# Altium PCB Microphone-Boards_V1.0.PcbDoc (part 1 of 2)
Units mm, origin at the board's own origin, x right, y up, seen from the top; angles counter-clockwise.
Board outline 112 x 88 mm, 2 copper layers (Top Layer, Bottom Layer), stack 1.548 mm thick; 320 components, 194 nets, 1232 pads, 0 vias.
Unrouted connection lines stored in the file: 718.
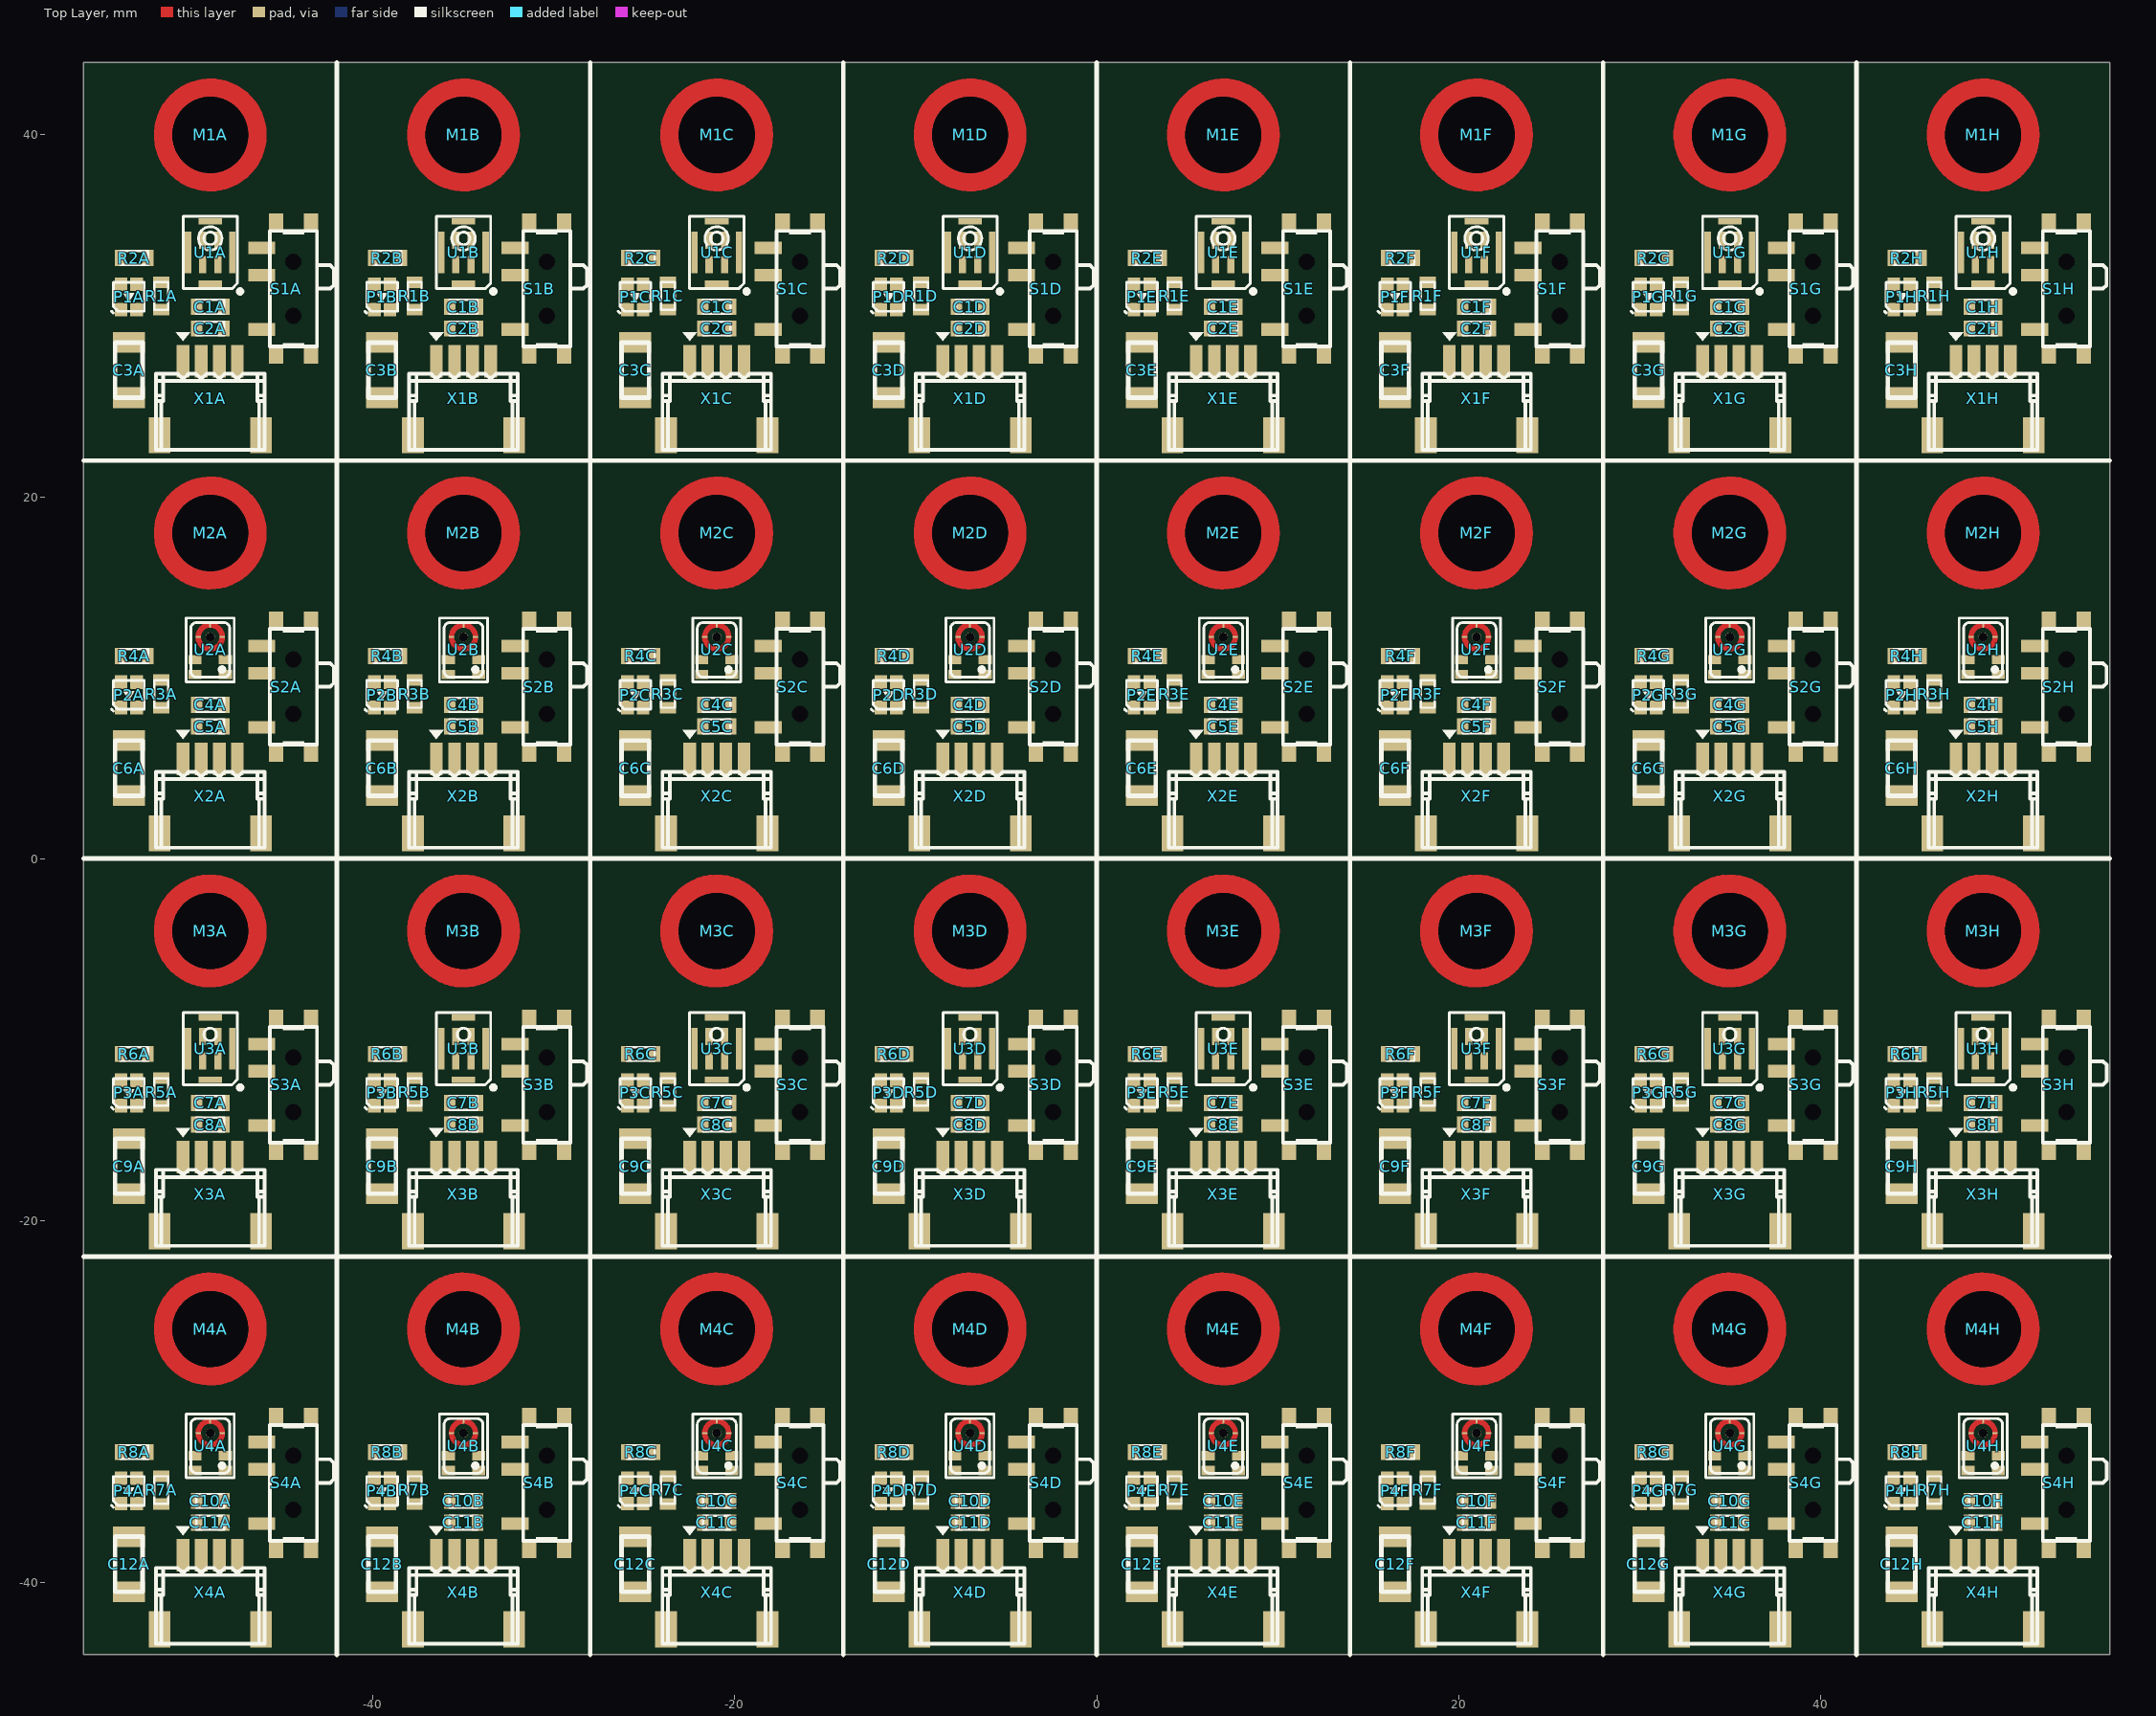
[diagram p0: Top Layer view]
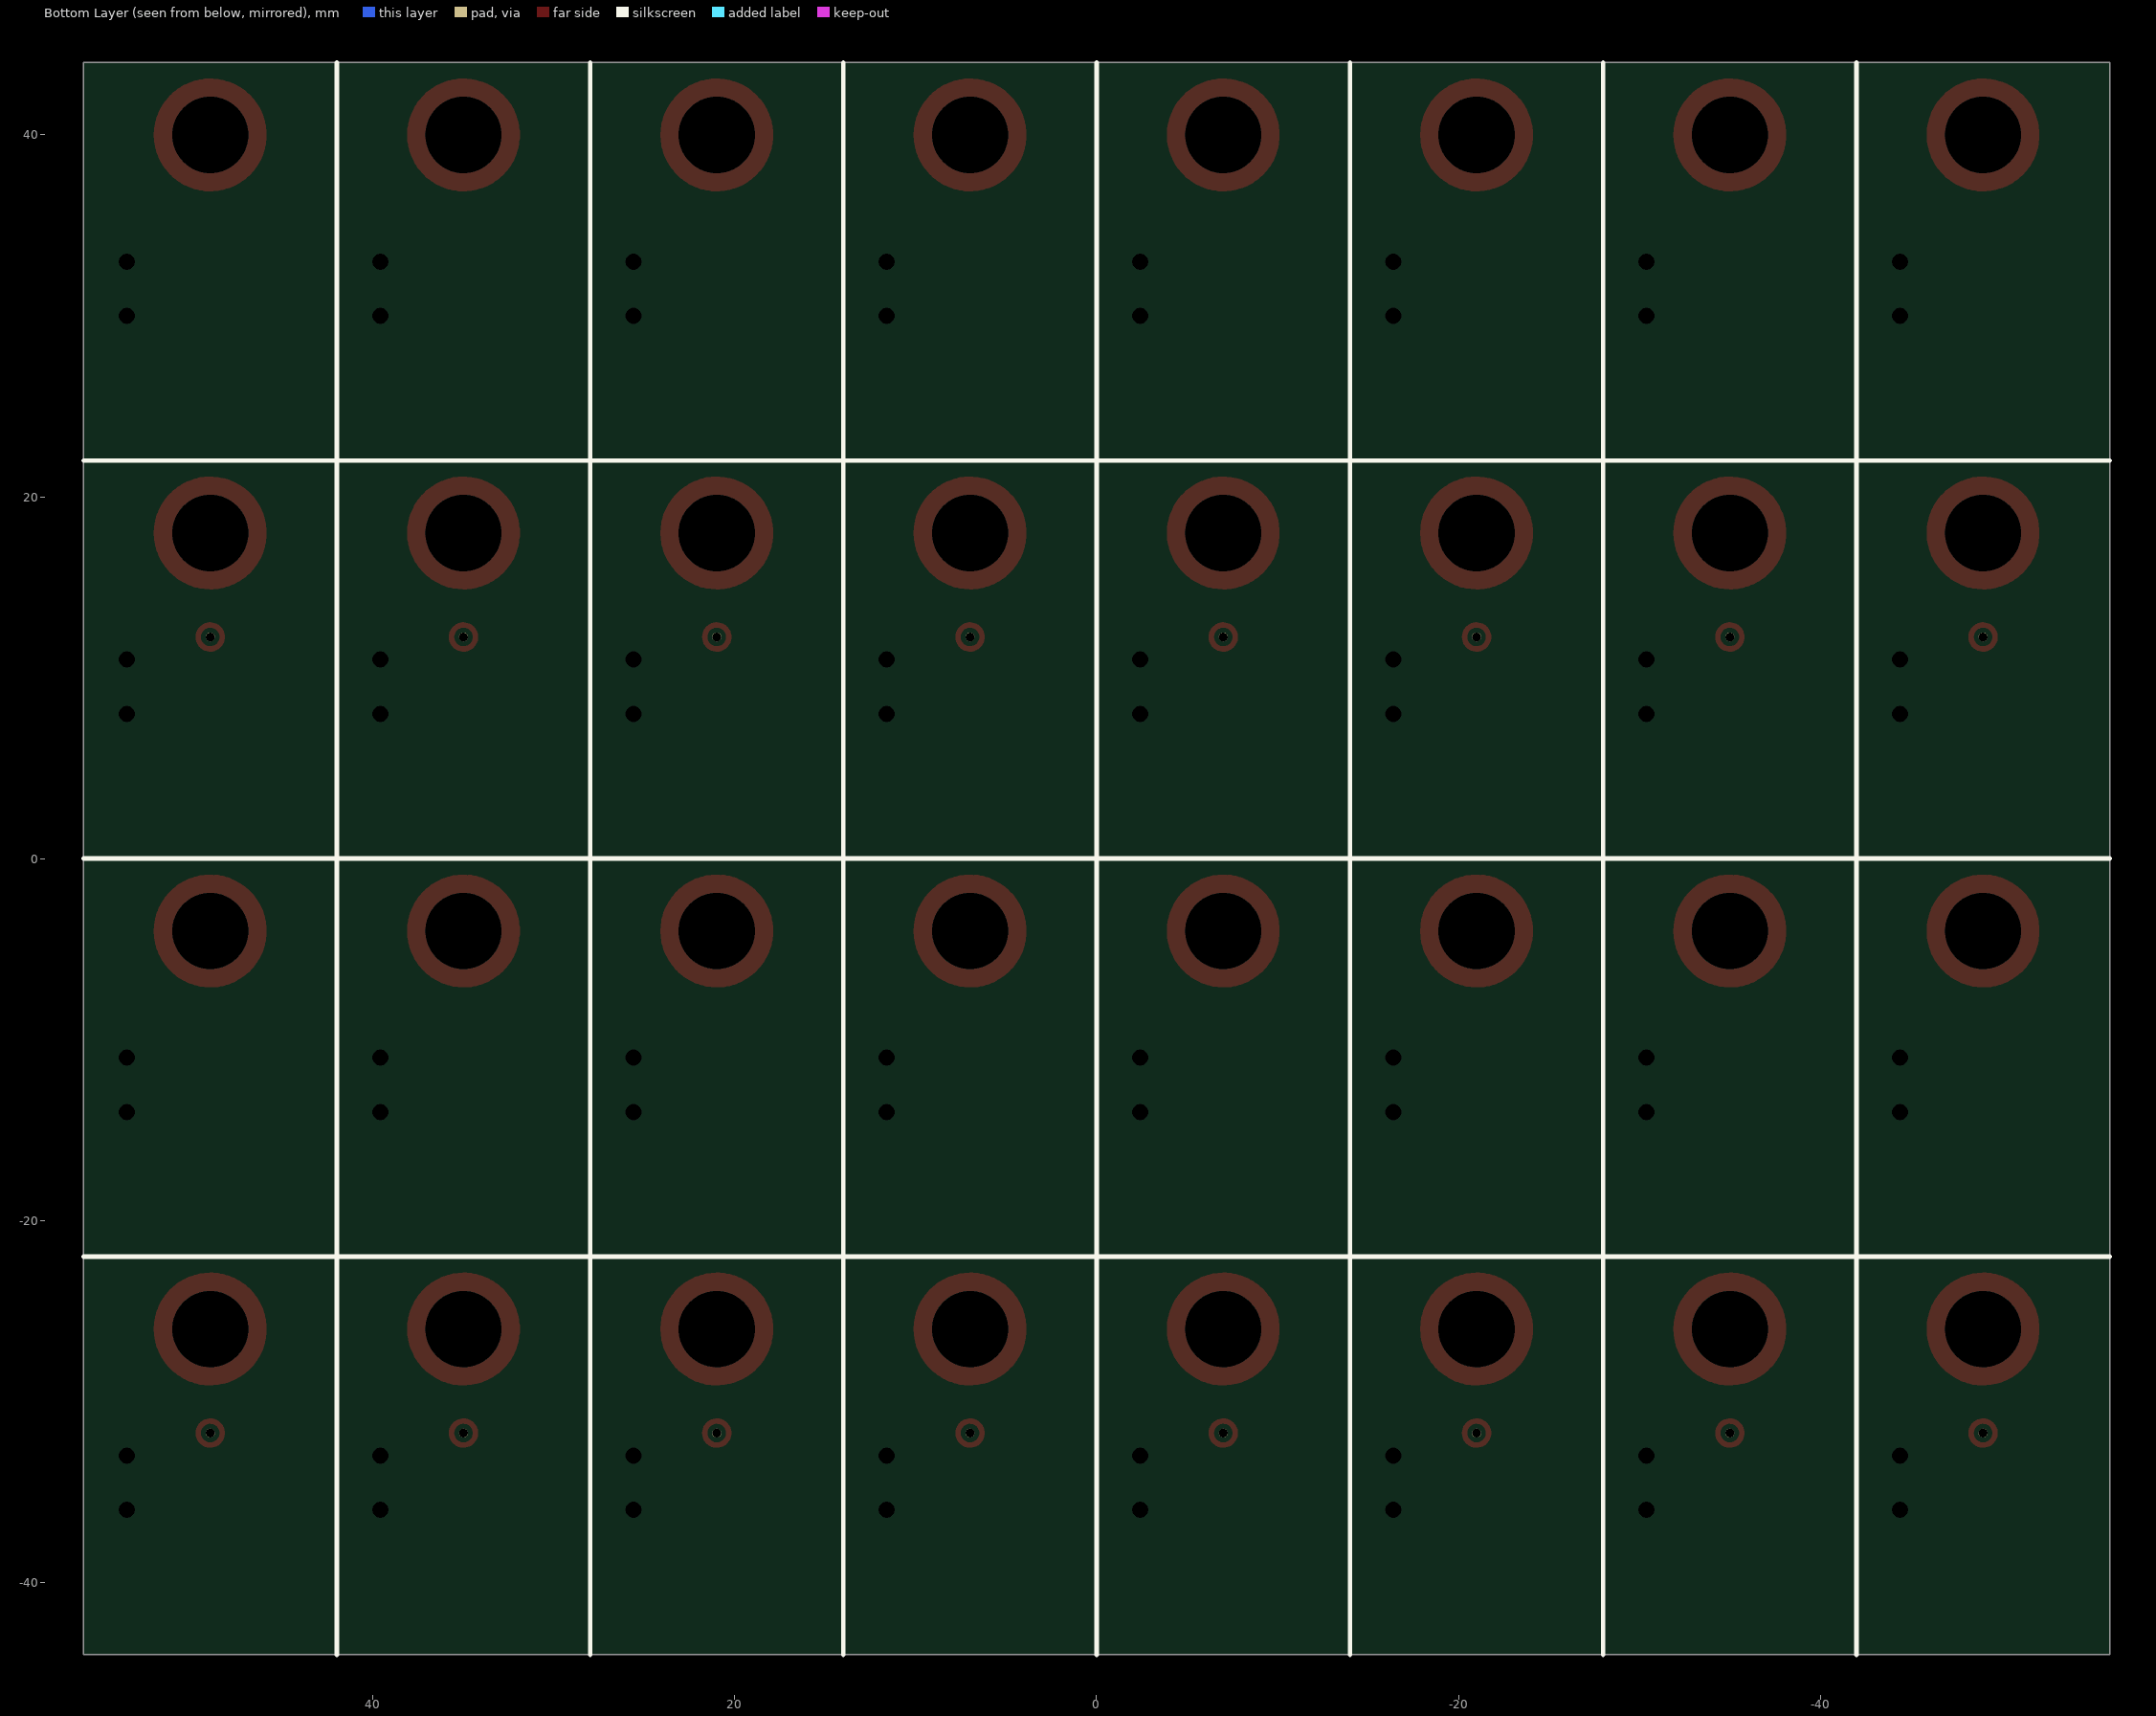
[diagram p1: Bottom Layer view, seen from below]

## Layer stack, top to bottom
Top Solder: solder mask 0.0102, Solder Resist, Dk 3.5
Top Layer: signal copper 0.0356
Dielectric1: dielectric 1.4766, FR-4, Dk 4.8
Bottom Layer: signal copper 0.0356
Bottom Solder: solder mask 0.0102, Solder Resist, Dk 3.5

## Board outline
-56,-44 56,-44 56,22 56,44 -56,44

## Design rules (kind name [scope] priority, off if disabled: settings)
Clearance Ploygon [InPoly] p1: gap=0.254 ignorepadtopadclearanceinfootprint=FALSE
Clearance [All] p2: gap=0.152 ignorepadtopadclearanceinfootprint=FALSE
ComponentClearance ComponentClearance_Connectors [HasFootprint('SMD Inductor 7x7x4.5 NP')] p1: gap=0 collisioncheckmode=3 verticalgap=0 showdistances=FALSE
ComponentClearance ComponentClearance_Mechanical [(Identifier = 'M3 x 0.5mm Thread 6mm LONG SOCKET HEAD CAP SCREW') OR (Identifier = 'Hex Spacer FF M3 L10mm')] p2: gap=0 collisioncheckmode=3 verticalgap=0 showdistances=FALSE
ComponentClearance [All] p3: gap=0.2 collisioncheckmode=3 verticalgap=0.2 showdistances=TRUE
DiffPairsRouting [All] p1: maxlimit=0.254 minlimit=0.152 mostfreqgap=0.152 toplayer_minwidth=0.152 toplayer_maxwidth=0.381 toplayer_prefwidth=0.152 bottomlayer_minwidth=0.152 bottomlayer_maxwidth=0.381 bottomlayer_prefwidth=0.152 maxuncoupledlength=12.7
FabricationTestPointUsage TestPointUsage [All] p1: valid=0 allowmultiple=FALSE
FabricationTestpoint Testpoint [All] p1: side=3 testpointundercomponent=TRUE minsize=1.016 maxsize=2.54 preferedsize=1.524 minholesize=0 maxholesize=1.016 preferedholesize=0.813 testpointgrid=0.025 allowsidetop=TRUE allowsidebottom=TRUE usegrid=TRUE gridtolerance=0
HoleSize [All] p1: absolutevalues=TRUE maxlimit=25.4 minlimit=0.025 maxpercent=80.000 minpercent=20.000
PolygonConnect [All] p1: thpad.connectstyle=Relief thpad.reliefconductorwidth=0.254 thpad.reliefentries=4 thpad.polygonreliefangle="90 Angle" thpad.airgapwidth=0.254 smdpad.connectstyle=Relief smdpad.reliefconductorwidth=0.254 smdpad.reliefentries=4 smdpad.polygonreliefangle="90 Angle" smdpad.airgapwidth=0.254 via.connectstyle=Direct via.reliefconductorwidth=0.254 via.reliefentries=4 via.polygonreliefangle="90 Angle" via.airgapwidth=0.254
RoomDefinition SD18OB2618 [InComponentClass('SD18OB2618')] p1: confinementstyle=ConfineIn formatcopy=TRUE lockcomponents=FALSE outline 42,-44 56,-44 56,-22 42,-22
RoomDefinition SD18OB2617 [InComponentClass('SD18OB2617')] p2: confinementstyle=ConfineIn formatcopy=TRUE lockcomponents=FALSE outline 28,-44 42,-44 42,-22 28,-22
RoomDefinition SD18OB2616 [InComponentClass('SD18OB2616')] p3: confinementstyle=ConfineIn formatcopy=TRUE lockcomponents=FALSE outline 14,-44 28,-44 28,-22 14,-22
RoomDefinition SD18OB2615 [InComponentClass('SD18OB2615')] p4: confinementstyle=ConfineIn formatcopy=TRUE lockcomponents=FALSE outline 0,-44 14,-44 14,-22 0,-22
RoomDefinition SD18OB2614 [InComponentClass('SD18OB2614')] p5: confinementstyle=ConfineIn formatcopy=TRUE lockcomponents=FALSE outline -14,-44 0,-44 0,-22 -14,-22
RoomDefinition SD18OB2613 [InComponentClass('SD18OB2613')] p6: confinementstyle=ConfineIn formatcopy=TRUE lockcomponents=FALSE outline -28,-44 -14,-44 -14,-22 -28,-22
RoomDefinition SD18OB2612 [InComponentClass('SD18OB2612')] p7: confinementstyle=ConfineIn formatcopy=TRUE lockcomponents=FALSE outline -42,-44 -28,-44 -28,-22 -42,-22
RoomDefinition SD18OB2611 [InComponentClass('SD18OB2611')] p8: confinementstyle=ConfineIn formatcopy=TRUE lockcomponents=FALSE outline -56,-44 -42,-44 -42,-22 -56,-22
RoomDefinition MP34DT05TR8 [InComponentClass('MP34DT05TR8')] p9: confinementstyle=ConfineIn formatcopy=TRUE lockcomponents=FALSE outline 42,22 56,22 56,44 42,44
RoomDefinition MP34DT05TR7 [InComponentClass('MP34DT05TR7')] p10: confinementstyle=ConfineIn formatcopy=TRUE lockcomponents=FALSE outline 28,22 42,22 42,44 28,44
RoomDefinition MP34DT05TR6 [InComponentClass('MP34DT05TR6')] p11: confinementstyle=ConfineIn formatcopy=TRUE lockcomponents=FALSE outline 14,22 28,22 28,44 14,44
RoomDefinition MP34DT05TR5 [InComponentClass('MP34DT05TR5')] p12: confinementstyle=ConfineIn formatcopy=TRUE lockcomponents=FALSE outline 0,22 14,22 14,44 0,44
RoomDefinition MP34DT05TR4 [InComponentClass('MP34DT05TR4')] p13: confinementstyle=ConfineIn formatcopy=TRUE lockcomponents=FALSE outline -14,22 0,22 0,44 -14,44
RoomDefinition MP34DT05TR3 [InComponentClass('MP34DT05TR3')] p14: confinementstyle=ConfineIn formatcopy=TRUE lockcomponents=FALSE outline -28,22 -14,22 -14,44 -28,44
RoomDefinition MP34DT05TR2 [InComponentClass('MP34DT05TR2')] p15: confinementstyle=ConfineIn formatcopy=TRUE lockcomponents=FALSE outline -42,22 -28,22 -28,44 -42,44
RoomDefinition MP34DT05TR1 [InComponentClass('MP34DT05TR1')] p16: confinementstyle=ConfineIn formatcopy=TRUE lockcomponents=FALSE outline -56,22 -42,22 -42,44 -56,44
RoomDefinition GMA4030H118 [InComponentClass('GMA4030H118')] p17: confinementstyle=ConfineIn formatcopy=TRUE lockcomponents=FALSE outline 42,-22 56,-22 56,0 42,0
RoomDefinition GMA4030H117 [InComponentClass('GMA4030H117')] p18: confinementstyle=ConfineIn formatcopy=TRUE lockcomponents=FALSE outline 28,-22 42,-22 42,0 28,0
RoomDefinition GMA4030H116 [InComponentClass('GMA4030H116')] p19: confinementstyle=ConfineIn formatcopy=TRUE lockcomponents=FALSE outline 14,-22 28,-22 28,0 14,0
RoomDefinition GMA4030H115 [InComponentClass('GMA4030H115')] p20: confinementstyle=ConfineIn formatcopy=TRUE lockcomponents=FALSE outline 0,-22 14,-22 14,0 0,0
RoomDefinition GMA4030H114 [InComponentClass('GMA4030H114')] p21: confinementstyle=ConfineIn formatcopy=TRUE lockcomponents=FALSE outline -14,-22 0,-22 0,0 -14,0
RoomDefinition GMA4030H113 [InComponentClass('GMA4030H113')] p22: confinementstyle=ConfineIn formatcopy=TRUE lockcomponents=FALSE outline -28,-22 -14,-22 -14,0 -28,0
RoomDefinition GMA4030H112 [InComponentClass('GMA4030H112')] p23: confinementstyle=ConfineIn formatcopy=TRUE lockcomponents=FALSE outline -42,-22 -28,-22 -28,0 -42,0
RoomDefinition GMA4030H111 [InComponentClass('GMA4030H111')] p24: confinementstyle=ConfineIn formatcopy=TRUE lockcomponents=FALSE outline -56,-22 -42,-22 -42,0 -56,0
RoomDefinition GMA3526H108 [InComponentClass('GMA3526H108')] p25: confinementstyle=ConfineIn formatcopy=TRUE lockcomponents=FALSE outline 42,0 56,0 56,22 42,22
RoomDefinition GMA3526H107 [InComponentClass('GMA3526H107')] p26: confinementstyle=ConfineIn formatcopy=TRUE lockcomponents=FALSE outline 28,0 42,0 42,22 28,22
RoomDefinition GMA3526H106 [InComponentClass('GMA3526H106')] p27: confinementstyle=ConfineIn formatcopy=TRUE lockcomponents=FALSE outline 14,0 28,0 28,22 14,22
RoomDefinition GMA3526H105 [InComponentClass('GMA3526H105')] p28: confinementstyle=ConfineIn formatcopy=TRUE lockcomponents=FALSE outline 0,0 14,0 14,22 0,22
RoomDefinition GMA3526H104 [InComponentClass('GMA3526H104')] p29: confinementstyle=ConfineIn formatcopy=TRUE lockcomponents=FALSE outline -14,0 0,0 0,22 -14,22
RoomDefinition GMA3526H103 [InComponentClass('GMA3526H103')] p30: confinementstyle=ConfineIn formatcopy=TRUE lockcomponents=FALSE outline -28,0 -14,0 -14,22 -28,22
RoomDefinition GMA3526H102 [InComponentClass('GMA3526H102')] p31: confinementstyle=ConfineIn formatcopy=TRUE lockcomponents=FALSE outline -42,0 -28,0 -28,22 -42,22
RoomDefinition GMA3526H101 [InComponentClass('GMA3526H101')] p32: confinementstyle=ConfineIn formatcopy=TRUE lockcomponents=FALSE outline -56,0 -42,0 -42,22 -56,22
RoutingVias [All] p1: holewidth=0.711 width=1.27 viastyle="Through Hole" minholewidth=0.711 minwidth=1.27 maxholewidth=0.711 maxwidth=1.27
SolderMaskExpansion [All] p1: expansion=0.102 istentingtop=FALSE
Width [All] p1: maxlimit=500 minlimit=0.152 preferedwidth=0.254
25 further rules are at their usual default settings.

## Classes and differential pairs
channel class Microphone-Boards_V1.0_SD18OB261: SD18OB2611 SD18OB2612 SD18OB2613 SD18OB2614 SD18OB2615 SD18OB2616 SD18OB2617 SD18OB2618
channel class Microphone-Boards_V1.0_MP34DT05TR: MP34DT05TR1 MP34DT05TR2 MP34DT05TR3 MP34DT05TR4 MP34DT05TR5 MP34DT05TR6 MP34DT05TR7 MP34DT05TR8
channel class Microphone-Boards_V1.0_GMA4030H11: GMA4030H111 GMA4030H112 GMA4030H113 GMA4030H114 GMA4030H115 GMA4030H116 GMA4030H117 GMA4030H118
channel class Microphone-Boards_V1.0_GMA3526H10: GMA3526H101 GMA3526H102 GMA3526H103 GMA3526H104 GMA3526H105 GMA3526H106 GMA3526H107 GMA3526H108
component class SD18OB2618: C10H C11H C12H M4H P4H R7H R8H S4H U4H X4H
component class SD18OB2617: C10G C11G C12G M4G P4G R7G R8G S4G U4G X4G
component class SD18OB2616: C10F C11F C12F M4F P4F R7F R8F S4F U4F X4F
component class SD18OB2615: C10E C11E C12E M4E P4E R7E R8E S4E U4E X4E
component class SD18OB2614: C10D C11D C12D M4D P4D R7D R8D S4D U4D X4D
component class SD18OB2613: C10C C11C C12C M4C P4C R7C R8C S4C U4C X4C
component class SD18OB2612: C10B C11B C12B M4B P4B R7B R8B S4B U4B X4B
component class SD18OB2611: C10A C11A C12A M4A P4A R7A R8A S4A U4A X4A
component class MP34DT05TR8: C1H C2H C3H M1H P1H R1H R2H S1H U1H X1H
component class MP34DT05TR7: C1G C2G C3G M1G P1G R1G R2G S1G U1G X1G
component class MP34DT05TR6: C1F C2F C3F M1F P1F R1F R2F S1F U1F X1F
component class MP34DT05TR5: C1E C2E C3E M1E P1E R1E R2E S1E U1E X1E
component class MP34DT05TR4: C1D C2D C3D M1D P1D R1D R2D S1D U1D X1D
component class MP34DT05TR3: C1C C2C C3C M1C P1C R1C R2C S1C U1C X1C
component class MP34DT05TR2: C1B C2B C3B M1B P1B R1B R2B S1B U1B X1B
component class MP34DT05TR1: C1A C2A C3A M1A P1A R1A R2A S1A U1A X1A
component class GMA4030H118: C7H C8H C9H M3H P3H R5H R6H S3H U3H X3H
component class GMA4030H117: C7G C8G C9G M3G P3G R5G R6G S3G U3G X3G
component class GMA4030H116: C7F C8F C9F M3F P3F R5F R6F S3F U3F X3F
component class GMA4030H115: C7E C8E C9E M3E P3E R5E R6E S3E U3E X3E
component class GMA4030H114: C7D C8D C9D M3D P3D R5D R6D S3D U3D X3D
component class GMA4030H113: C7C C8C C9C M3C P3C R5C R6C S3C U3C X3C
component class GMA4030H112: C7B C8B C9B M3B P3B R5B R6B S3B U3B X3B
component class GMA4030H111: C7A C8A C9A M3A P3A R5A R6A S3A U3A X3A
component class GMA3526H108: C4H C5H C6H M2H P2H R3H R4H S2H U2H X2H
component class GMA3526H107: C4G C5G C6G M2G P2G R3G R4G S2G U2G X2G
component class GMA3526H106: C4F C5F C6F M2F P2F R3F R4F S2F U2F X2F
component class GMA3526H105: C4E C5E C6E M2E P2E R3E R4E S2E U2E X2E
component class GMA3526H104: C4D C5D C6D M2D P2D R3D R4D S2D U2D X2D
component class GMA3526H103: C4C C5C C6C M2C P2C R3C R4C S2C U2C X2C
component class GMA3526H102: C4B C5B C6B M2B P2B R3B R4B S2B U2B X2B
component class GMA3526H101: C4A C5A C6A M2A P2A R3A R4A S2A U2A X2A

## Components (designator, comment, footprint, x,y, rotation, side; value= is the part's Value field where it differs from the comment)
C1A "10nF" "SMD Keramikkondensator 0603" -49,30.5 r0 top (schematic designator C1)
C1B "10nF" "SMD Keramikkondensator 0603" -35,30.5 r0 top (schematic designator C1)
C1C "10nF" "SMD Keramikkondensator 0603" -21,30.5 r0 top (schematic designator C1)
C1D "10nF" "SMD Keramikkondensator 0603" -7,30.5 r0 top (schematic designator C1)
C1E "10nF" "SMD Keramikkondensator 0603" 7,30.5 r0 top (schematic designator C1)
C1F "10nF" "SMD Keramikkondensator 0603" 21,30.5 r0 top (schematic designator C1)
C1G "10nF" "SMD Keramikkondensator 0603" 35,30.5 r0 top (schematic designator C1)
C1H "10nF" "SMD Keramikkondensator 0603" 49,30.5 r0 top (schematic designator C1)
C2A "100nF" "SMD Keramikkondensator 0603" -49,29.3 r0 top (schematic designator C2)
C2B "100nF" "SMD Keramikkondensator 0603" -35,29.3 r0 top (schematic designator C2)
C2C "100nF" "SMD Keramikkondensator 0603" -21,29.3 r0 top (schematic designator C2)
C2D "100nF" "SMD Keramikkondensator 0603" -7,29.3 r0 top (schematic designator C2)
C2E "100nF" "SMD Keramikkondensator 0603" 7,29.3 r0 top (schematic designator C2)
C2F "100nF" "SMD Keramikkondensator 0603" 21,29.3 r0 top (schematic designator C2)
C2G "100nF" "SMD Keramikkondensator 0603" 35,29.3 r0 top (schematic designator C2)
C2H "100nF" "SMD Keramikkondensator 0603" 49,29.3 r0 top (schematic designator C2)
C3A "10µF" "SMD Keramikkondensator 1206" -53.5,27 r270 top (schematic designator C3)
C3B "10µF" "SMD Keramikkondensator 1206" -39.5,27 r270 top (schematic designator C3)
C3C "10µF" "SMD Keramikkondensator 1206" -25.5,27 r270 top (schematic designator C3)
C3D "10µF" "SMD Keramikkondensator 1206" -11.5,27 r270 top (schematic designator C3)
C3E "10µF" "SMD Keramikkondensator 1206" 2.5,27 r270 top (schematic designator C3)
C3F "10µF" "SMD Keramikkondensator 1206" 16.5,27 r270 top (schematic designator C3)
C3G "10µF" "SMD Keramikkondensator 1206" 30.5,27 r270 top (schematic designator C3)
C3H "10µF" "SMD Keramikkondensator 1206" 44.5,27 r270 top (schematic designator C3)
C4A "10nF" "SMD Keramikkondensator 0603" -49,8.5 r0 top (schematic designator C4)
C4B "10nF" "SMD Keramikkondensator 0603" -35,8.5 r0 top (schematic designator C4)
C4C "10nF" "SMD Keramikkondensator 0603" -21,8.5 r0 top (schematic designator C4)
C4D "10nF" "SMD Keramikkondensator 0603" -7,8.5 r0 top (schematic designator C4)
C4E "10nF" "SMD Keramikkondensator 0603" 7,8.5 r0 top (schematic designator C4)
C4F "10nF" "SMD Keramikkondensator 0603" 21,8.5 r0 top (schematic designator C4)
C4G "10nF" "SMD Keramikkondensator 0603" 35,8.5 r0 top (schematic designator C4)
C4H "10nF" "SMD Keramikkondensator 0603" 49,8.5 r0 top (schematic designator C4)
C5A "100nF" "SMD Keramikkondensator 0603" -49,7.3 r0 top (schematic designator C5)
C5B "100nF" "SMD Keramikkondensator 0603" -35,7.3 r0 top (schematic designator C5)
C5C "100nF" "SMD Keramikkondensator 0603" -21,7.3 r0 top (schematic designator C5)
C5D "100nF" "SMD Keramikkondensator 0603" -7,7.3 r0 top (schematic designator C5)
C5E "100nF" "SMD Keramikkondensator 0603" 7,7.3 r0 top (schematic designator C5)
C5F "100nF" "SMD Keramikkondensator 0603" 21,7.3 r0 top (schematic designator C5)
C5G "100nF" "SMD Keramikkondensator 0603" 35,7.3 r0 top (schematic designator C5)
C5H "100nF" "SMD Keramikkondensator 0603" 49,7.3 r0 top (schematic designator C5)
C6A "10µF" "SMD Keramikkondensator 1206" -53.5,5 r270 top (schematic designator C6)
C6B "10µF" "SMD Keramikkondensator 1206" -39.5,5 r270 top (schematic designator C6)
C6C "10µF" "SMD Keramikkondensator 1206" -25.5,5 r270 top (schematic designator C6)
C6D "10µF" "SMD Keramikkondensator 1206" -11.5,5 r270 top (schematic designator C6)
C6E "10µF" "SMD Keramikkondensator 1206" 2.5,5 r270 top (schematic designator C6)
C6F "10µF" "SMD Keramikkondensator 1206" 16.5,5 r270 top (schematic designator C6)
C6G "10µF" "SMD Keramikkondensator 1206" 30.5,5 r270 top (schematic designator C6)
C6H "10µF" "SMD Keramikkondensator 1206" 44.5,5 r270 top (schematic designator C6)
C7A "10nF" "SMD Keramikkondensator 0603" -49,-13.5 r0 top (schematic designator C7)
C7B "10nF" "SMD Keramikkondensator 0603" -35,-13.5 r0 top (schematic designator C7)
C7C "10nF" "SMD Keramikkondensator 0603" -21,-13.5 r0 top (schematic designator C7)
C7D "10nF" "SMD Keramikkondensator 0603" -7,-13.5 r0 top (schematic designator C7)
C7E "10nF" "SMD Keramikkondensator 0603" 7,-13.5 r0 top (schematic designator C7)
C7F "10nF" "SMD Keramikkondensator 0603" 21,-13.5 r0 top (schematic designator C7)
C7G "10nF" "SMD Keramikkondensator 0603" 35,-13.5 r0 top (schematic designator C7)
C7H "10nF" "SMD Keramikkondensator 0603" 49,-13.5 r0 top (schematic designator C7)
C8A "100nF" "SMD Keramikkondensator 0603" -49,-14.7 r0 top (schematic designator C8)
C8B "100nF" "SMD Keramikkondensator 0603" -35,-14.7 r0 top (schematic designator C8)
C8C "100nF" "SMD Keramikkondensator 0603" -21,-14.7 r0 top (schematic designator C8)
C8D "100nF" "SMD Keramikkondensator 0603" -7,-14.7 r0 top (schematic designator C8)
C8E "100nF" "SMD Keramikkondensator 0603" 7,-14.7 r0 top (schematic designator C8)
C8F "100nF" "SMD Keramikkondensator 0603" 21,-14.7 r0 top (schematic designator C8)
C8G "100nF" "SMD Keramikkondensator 0603" 35,-14.7 r0 top (schematic designator C8)
C8H "100nF" "SMD Keramikkondensator 0603" 49,-14.7 r0 top (schematic designator C8)
C9A "10µF" "SMD Keramikkondensator 1206" -53.5,-17 r270 top (schematic designator C9)
C9B "10µF" "SMD Keramikkondensator 1206" -39.5,-17 r270 top (schematic designator C9)
C9C "10µF" "SMD Keramikkondensator 1206" -25.5,-17 r270 top (schematic designator C9)
C9D "10µF" "SMD Keramikkondensator 1206" -11.5,-17 r270 top (schematic designator C9)
C9E "10µF" "SMD Keramikkondensator 1206" 2.5,-17 r270 top (schematic designator C9)
C9F "10µF" "SMD Keramikkondensator 1206" 16.5,-17 r270 top (schematic designator C9)
C9G "10µF" "SMD Keramikkondensator 1206" 30.5,-17 r270 top (schematic designator C9)
C9H "10µF" "SMD Keramikkondensator 1206" 44.5,-17 r270 top (schematic designator C9)
C10A "10nF" "SMD Keramikkondensator 0603" -49,-35.5 r0 top (schematic designator C10)
C10B "10nF" "SMD Keramikkondensator 0603" -35,-35.5 r0 top (schematic designator C10)
C10C "10nF" "SMD Keramikkondensator 0603" -21,-35.5 r0 top (schematic designator C10)
C10D "10nF" "SMD Keramikkondensator 0603" -7,-35.5 r0 top (schematic designator C10)
C10E "10nF" "SMD Keramikkondensator 0603" 7,-35.5 r0 top (schematic designator C10)
C10F "10nF" "SMD Keramikkondensator 0603" 21,-35.5 r0 top (schematic designator C10)
C10G "10nF" "SMD Keramikkondensator 0603" 35,-35.5 r0 top (schematic designator C10)
C10H "10nF" "SMD Keramikkondensator 0603" 49,-35.5 r0 top (schematic designator C10)
C11A "100nF" "SMD Keramikkondensator 0603" -49,-36.7 r0 top (schematic designator C11)
C11B "100nF" "SMD Keramikkondensator 0603" -35,-36.7 r0 top (schematic designator C11)
C11C "100nF" "SMD Keramikkondensator 0603" -21,-36.7 r0 top (schematic designator C11)
C11D "100nF" "SMD Keramikkondensator 0603" -7,-36.7 r0 top (schematic designator C11)
C11E "100nF" "SMD Keramikkondensator 0603" 7,-36.7 r0 top (schematic designator C11)
C11F "100nF" "SMD Keramikkondensator 0603" 21,-36.7 r0 top (schematic designator C11)
C11G "100nF" "SMD Keramikkondensator 0603" 35,-36.7 r0 top (schematic designator C11)
C11H "100nF" "SMD Keramikkondensator 0603" 49,-36.7 r0 top (schematic designator C11)
C12A "10µF" "SMD Keramikkondensator 1206" -53.5,-39 r270 top (schematic designator C12)
C12B "10µF" "SMD Keramikkondensator 1206" -39.5,-39 r270 top (schematic designator C12)
C12C "10µF" "SMD Keramikkondensator 1206" -25.5,-39 r270 top (schematic designator C12)
C12D "10µF" "SMD Keramikkondensator 1206" -11.5,-39 r270 top (schematic designator C12)
C12E "10µF" "SMD Keramikkondensator 1206" 2.5,-39 r270 top (schematic designator C12)
C12F "10µF" "SMD Keramikkondensator 1206" 16.5,-39 r270 top (schematic designator C12)
C12G "10µF" "SMD Keramikkondensator 1206" 30.5,-39 r270 top (schematic designator C12)
C12H "10µF" "SMD Keramikkondensator 1206" 44.5,-39 r270 top (schematic designator C12)
M1A "SMTSO-M3-3ET" "SMD Solder-Nut (M3 3mm)" -49,40 r0 top (schematic designator M1)
M1B "SMTSO-M3-3ET" "SMD Solder-Nut (M3 3mm)" -35,40 r0 top (schematic designator M1)
M1C "SMTSO-M3-3ET" "SMD Solder-Nut (M3 3mm)" -21,40 r0 top (schematic designator M1)
M1D "SMTSO-M3-3ET" "SMD Solder-Nut (M3 3mm)" -7,40 r0 top (schematic designator M1)
M1E "SMTSO-M3-3ET" "SMD Solder-Nut (M3 3mm)" 7,40 r0 top (schematic designator M1)
M1F "SMTSO-M3-3ET" "SMD Solder-Nut (M3 3mm)" 21,40 r0 top (schematic designator M1)
M1G "SMTSO-M3-3ET" "SMD Solder-Nut (M3 3mm)" 35,40 r0 top (schematic designator M1)
M1H "SMTSO-M3-3ET" "SMD Solder-Nut (M3 3mm)" 49,40 r0 top (schematic designator M1)
M2A "SMTSO-M3-3ET" "SMD Solder-Nut (M3 3mm)" -49,18 r0 top (schematic designator M2)
M2B "SMTSO-M3-3ET" "SMD Solder-Nut (M3 3mm)" -35,18 r0 top (schematic designator M2)
M2C "SMTSO-M3-3ET" "SMD Solder-Nut (M3 3mm)" -21,18 r0 top (schematic designator M2)
M2D "SMTSO-M3-3ET" "SMD Solder-Nut (M3 3mm)" -7,18 r0 top (schematic designator M2)
M2E "SMTSO-M3-3ET" "SMD Solder-Nut (M3 3mm)" 7,18 r0 top (schematic designator M2)
M2F "SMTSO-M3-3ET" "SMD Solder-Nut (M3 3mm)" 21,18 r0 top (schematic designator M2)
M2G "SMTSO-M3-3ET" "SMD Solder-Nut (M3 3mm)" 35,18 r0 top (schematic designator M2)
M2H "SMTSO-M3-3ET" "SMD Solder-Nut (M3 3mm)" 49,18 r0 top (schematic designator M2)
M3A "SMTSO-M3-3ET" "SMD Solder-Nut (M3 3mm)" -49,-4 r0 top (schematic designator M3)
M3B "SMTSO-M3-3ET" "SMD Solder-Nut (M3 3mm)" -35,-4 r0 top (schematic designator M3)
M3C "SMTSO-M3-3ET" "SMD Solder-Nut (M3 3mm)" -21,-4 r0 top (schematic designator M3)
M3D "SMTSO-M3-3ET" "SMD Solder-Nut (M3 3mm)" -7,-4 r0 top (schematic designator M3)
M3E "SMTSO-M3-3ET" "SMD Solder-Nut (M3 3mm)" 7,-4 r0 top (schematic designator M3)
M3F "SMTSO-M3-3ET" "SMD Solder-Nut (M3 3mm)" 21,-4 r0 top (schematic designator M3)
M3G "SMTSO-M3-3ET" "SMD Solder-Nut (M3 3mm)" 35,-4 r0 top (schematic designator M3)
M3H "SMTSO-M3-3ET" "SMD Solder-Nut (M3 3mm)" 49,-4 r0 top (schematic designator M3)
M4A "SMTSO-M3-3ET" "SMD Solder-Nut (M3 3mm)" -49,-26 r0 top (schematic designator M4)
M4B "SMTSO-M3-3ET" "SMD Solder-Nut (M3 3mm)" -35,-26 r0 top (schematic designator M4)
M4C "SMTSO-M3-3ET" "SMD Solder-Nut (M3 3mm)" -21,-26 r0 top (schematic designator M4)
M4D "SMTSO-M3-3ET" "SMD Solder-Nut (M3 3mm)" -7,-26 r0 top (schematic designator M4)
M4E "SMTSO-M3-3ET" "SMD Solder-Nut (M3 3mm)" 7,-26 r0 top (schematic designator M4)
M4F "SMTSO-M3-3ET" "SMD Solder-Nut (M3 3mm)" 21,-26 r0 top (schematic designator M4)
M4G "SMTSO-M3-3ET" "SMD Solder-Nut (M3 3mm)" 35,-26 r0 top (schematic designator M4)
M4H "SMTSO-M3-3ET" "SMD Solder-Nut (M3 3mm)" 49,-26 r0 top (schematic designator M4)
P1A "XL-1615SURUWC" "SMD LED 0606" -53.5,31.05 r90 top (schematic designator P1)
P1B "XL-1615SURUWC" "SMD LED 0606" -39.5,31.05 r90 top (schematic designator P1)
P1C "XL-1615SURUWC" "SMD LED 0606" -25.5,31.05 r90 top (schematic designator P1)
P1D "XL-1615SURUWC" "SMD LED 0606" -11.5,31.05 r90 top (schematic designator P1)
P1E "XL-1615SURUWC" "SMD LED 0606" 2.5,31.05 r90 top (schematic designator P1)
P1F "XL-1615SURUWC" "SMD LED 0606" 16.5,31.05 r90 top (schematic designator P1)
P1G "XL-1615SURUWC" "SMD LED 0606" 30.5,31.05 r90 top (schematic designator P1)
P1H "XL-1615SURUWC" "SMD LED 0606" 44.5,31.05 r90 top (schematic designator P1)
P2A "XL-1615SURUWC" "SMD LED 0606" -53.5,9.05 r90 top (schematic designator P2)
P2B "XL-1615SURUWC" "SMD LED 0606" -39.5,9.05 r90 top (schematic designator P2)
P2C "XL-1615SURUWC" "SMD LED 0606" -25.5,9.05 r90 top (schematic designator P2)
P2D "XL-1615SURUWC" "SMD LED 0606" -11.5,9.05 r90 top (schematic designator P2)
P2E "XL-1615SURUWC" "SMD LED 0606" 2.5,9.05 r90 top (schematic designator P2)
P2F "XL-1615SURUWC" "SMD LED 0606" 16.5,9.05 r90 top (schematic designator P2)
P2G "XL-1615SURUWC" "SMD LED 0606" 30.5,9.05 r90 top (schematic designator P2)
P2H "XL-1615SURUWC" "SMD LED 0606" 44.5,9.05 r90 top (schematic designator P2)
P3A "XL-1615SURUWC" "SMD LED 0606" -53.5,-12.95 r90 top (schematic designator P3)
P3B "XL-1615SURUWC" "SMD LED 0606" -39.5,-12.95 r90 top (schematic designator P3)
P3C "XL-1615SURUWC" "SMD LED 0606" -25.5,-12.95 r90 top (schematic designator P3)
P3D "XL-1615SURUWC" "SMD LED 0606" -11.5,-12.95 r90 top (schematic designator P3)
P3E "XL-1615SURUWC" "SMD LED 0606" 2.5,-12.95 r90 top (schematic designator P3)
P3F "XL-1615SURUWC" "SMD LED 0606" 16.5,-12.95 r90 top (schematic designator P3)
P3G "XL-1615SURUWC" "SMD LED 0606" 30.5,-12.95 r90 top (schematic designator P3)
P3H "XL-1615SURUWC" "SMD LED 0606" 44.5,-12.95 r90 top (schematic designator P3)
P4A "XL-1615SURUWC" "SMD LED 0606" -53.5,-34.95 r90 top (schematic designator P4)
P4B "XL-1615SURUWC" "SMD LED 0606" -39.5,-34.95 r90 top (schematic designator P4)
P4C "XL-1615SURUWC" "SMD LED 0606" -25.5,-34.95 r90 top (schematic designator P4)
P4D "XL-1615SURUWC" "SMD LED 0606" -11.5,-34.95 r90 top (schematic designator P4)
P4E "XL-1615SURUWC" "SMD LED 0606" 2.5,-34.95 r90 top (schematic designator P4)
P4F "XL-1615SURUWC" "SMD LED 0606" 16.5,-34.95 r90 top (schematic designator P4)
P4G "XL-1615SURUWC" "SMD LED 0606" 30.5,-34.95 r90 top (schematic designator P4)
P4H "XL-1615SURUWC" "SMD LED 0606" 44.5,-34.95 r90 top (schematic designator P4)
R1A "390" "SMD Widerstand 0603" -51.7,31.1 r270 top (schematic designator R1)
R1B "390" "SMD Widerstand 0603" -37.7,31.1 r270 top (schematic designator R1)
R1C "390" "SMD Widerstand 0603" -23.7,31.1 r270 top (schematic designator R1)
R1D "390" "SMD Widerstand 0603" -9.7,31.1 r270 top (schematic designator R1)
R1E "390" "SMD Widerstand 0603" 4.3,31.1 r270 top (schematic designator R1)
R1F "390" "SMD Widerstand 0603" 18.3,31.1 r270 top (schematic designator R1)
R1G "390" "SMD Widerstand 0603" 32.3,31.1 r270 top (schematic designator R1)
R1H "390" "SMD Widerstand 0603" 46.3,31.1 r270 top (schematic designator R1)
R2A "820" "SMD Widerstand 0603" -53.2,33.2 r180 top (schematic designator R2)
R2B "820" "SMD Widerstand 0603" -39.2,33.2 r180 top (schematic designator R2)
R2C "820" "SMD Widerstand 0603" -25.2,33.2 r180 top (schematic designator R2)
R2D "820" "SMD Widerstand 0603" -11.2,33.2 r180 top (schematic designator R2)
R2E "820" "SMD Widerstand 0603" 2.8,33.2 r180 top (schematic designator R2)
R2F "820" "SMD Widerstand 0603" 16.8,33.2 r180 top (schematic designator R2)
R2G "820" "SMD Widerstand 0603" 30.8,33.2 r180 top (schematic designator R2)
R2H "820" "SMD Widerstand 0603" 44.8,33.2 r180 top (schematic designator R2)
R3A "390" "SMD Widerstand 0603" -51.7,9.1 r270 top (schematic designator R3)
R3B "390" "SMD Widerstand 0603" -37.7,9.1 r270 top (schematic designator R3)
R3C "390" "SMD Widerstand 0603" -23.7,9.1 r270 top (schematic designator R3)
R3D "390" "SMD Widerstand 0603" -9.7,9.1 r270 top (schematic designator R3)
R3E "390" "SMD Widerstand 0603" 4.3,9.1 r270 top (schematic designator R3)
R3F "390" "SMD Widerstand 0603" 18.3,9.1 r270 top (schematic designator R3)
R3G "390" "SMD Widerstand 0603" 32.3,9.1 r270 top (schematic designator R3)
R3H "390" "SMD Widerstand 0603" 46.3,9.1 r270 top (schematic designator R3)
R4A "820" "SMD Widerstand 0603" -53.2,11.2 r180 top (schematic designator R4)
R4B "820" "SMD Widerstand 0603" -39.2,11.2 r180 top (schematic designator R4)
R4C "820" "SMD Widerstand 0603" -25.2,11.2 r180 top (schematic designator R4)
R4D "820" "SMD Widerstand 0603" -11.2,11.2 r180 top (schematic designator R4)
R4E "820" "SMD Widerstand 0603" 2.8,11.2 r180 top (schematic designator R4)
R4F "820" "SMD Widerstand 0603" 16.8,11.2 r180 top (schematic designator R4)
R4G "820" "SMD Widerstand 0603" 30.8,11.2 r180 top (schematic designator R4)
R4H "820" "SMD Widerstand 0603" 44.8,11.2 r180 top (schematic designator R4)
R5A "390" "SMD Widerstand 0603" -51.7,-12.9 r270 top (schematic designator R5)
R5B "390" "SMD Widerstand 0603" -37.7,-12.9 r270 top (schematic designator R5)
R5C "390" "SMD Widerstand 0603" -23.7,-12.9 r270 top (schematic designator R5)
R5D "390" "SMD Widerstand 0603" -9.7,-12.9 r270 top (schematic designator R5)
R5E "390" "SMD Widerstand 0603" 4.3,-12.9 r270 top (schematic designator R5)
R5F "390" "SMD Widerstand 0603" 18.3,-12.9 r270 top (schematic designator R5)
R5G "390" "SMD Widerstand 0603" 32.3,-12.9 r270 top (schematic designator R5)
R5H "390" "SMD Widerstand 0603" 46.3,-12.9 r270 top (schematic designator R5)
R6A "820" "SMD Widerstand 0603" -53.2,-10.8 r180 top (schematic designator R6)
R6B "820" "SMD Widerstand 0603" -39.2,-10.8 r180 top (schematic designator R6)
R6C "820" "SMD Widerstand 0603" -25.2,-10.8 r180 top (schematic designator R6)
R6D "820" "SMD Widerstand 0603" -11.2,-10.8 r180 top (schematic designator R6)
R6E "820" "SMD Widerstand 0603" 2.8,-10.8 r180 top (schematic designator R6)
R6F "820" "SMD Widerstand 0603" 16.8,-10.8 r180 top (schematic designator R6)
R6G "820" "SMD Widerstand 0603" 30.8,-10.8 r180 top (schematic designator R6)
R6H "820" "SMD Widerstand 0603" 44.8,-10.8 r180 top (schematic designator R6)
R7A "390" "SMD Widerstand 0603" -51.7,-34.9 r270 top (schematic designator R7)
R7B "390" "SMD Widerstand 0603" -37.7,-34.9 r270 top (schematic designator R7)
R7C "390" "SMD Widerstand 0603" -23.7,-34.9 r270 top (schematic designator R7)
R7D "390" "SMD Widerstand 0603" -9.7,-34.9 r270 top (schematic designator R7)
R7E "390" "SMD Widerstand 0603" 4.3,-34.9 r270 top (schematic designator R7)
R7F "390" "SMD Widerstand 0603" 18.3,-34.9 r270 top (schematic designator R7)
R7G "390" "SMD Widerstand 0603" 32.3,-34.9 r270 top (schematic designator R7)
R7H "390" "SMD Widerstand 0603" 46.3,-34.9 r270 top (schematic designator R7)
R8A "820" "SMD Widerstand 0603" -53.2,-32.8 r180 top (schematic designator R8)
R8B "820" "SMD Widerstand 0603" -39.2,-32.8 r180 top (schematic designator R8)
R8C "820" "SMD Widerstand 0603" -25.2,-32.8 r180 top (schematic designator R8)
R8D "820" "SMD Widerstand 0603" -11.2,-32.8 r180 top (schematic designator R8)
R8E "820" "SMD Widerstand 0603" 2.8,-32.8 r180 top (schematic designator R8)
R8F "820" "SMD Widerstand 0603" 16.8,-32.8 r180 top (schematic designator R8)
R8G "820" "SMD Widerstand 0603" 30.8,-32.8 r180 top (schematic designator R8)
R8H "820" "SMD Widerstand 0603" 44.8,-32.8 r180 top (schematic designator R8)
S1A "PCM12SMTR" "SMD SWITCH SPDT (PCM12SMTR)" -44.4,31.5 r90 top (schematic designator S1)
S1B "PCM12SMTR" "SMD SWITCH SPDT (PCM12SMTR)" -30.4,31.5 r90 top (schematic designator S1)
S1C "PCM12SMTR" "SMD SWITCH SPDT (PCM12SMTR)" -16.4,31.5 r90 top (schematic designator S1)
S1D "PCM12SMTR" "SMD SWITCH SPDT (PCM12SMTR)" -2.4,31.5 r90 top (schematic designator S1)
S1E "PCM12SMTR" "SMD SWITCH SPDT (PCM12SMTR)" 11.6,31.5 r90 top (schematic designator S1)
S1F "PCM12SMTR" "SMD SWITCH SPDT (PCM12SMTR)" 25.6,31.5 r90 top (schematic designator S1)
S1G "PCM12SMTR" "SMD SWITCH SPDT (PCM12SMTR)" 39.6,31.5 r90 top (schematic designator S1)
S1H "PCM12SMTR" "SMD SWITCH SPDT (PCM12SMTR)" 53.6,31.5 r90 top (schematic designator S1)
S2A "PCM12SMTR" "SMD SWITCH SPDT (PCM12SMTR)" -44.4,9.5 r90 top (schematic designator S2)
S2B "PCM12SMTR" "SMD SWITCH SPDT (PCM12SMTR)" -30.4,9.5 r90 top (schematic designator S2)
S2C "PCM12SMTR" "SMD SWITCH SPDT (PCM12SMTR)" -16.4,9.5 r90 top (schematic designator S2)
S2D "PCM12SMTR" "SMD SWITCH SPDT (PCM12SMTR)" -2.4,9.5 r90 top (schematic designator S2)
S2E "PCM12SMTR" "SMD SWITCH SPDT (PCM12SMTR)" 11.6,9.5 r90 top (schematic designator S2)
S2F "PCM12SMTR" "SMD SWITCH SPDT (PCM12SMTR)" 25.6,9.5 r90 top (schematic designator S2)
S2G "PCM12SMTR" "SMD SWITCH SPDT (PCM12SMTR)" 39.6,9.5 r90 top (schematic designator S2)
S2H "PCM12SMTR" "SMD SWITCH SPDT (PCM12SMTR)" 53.6,9.5 r90 top (schematic designator S2)
S3A "PCM12SMTR" "SMD SWITCH SPDT (PCM12SMTR)" -44.4,-12.5 r90 top (schematic designator S3)
S3B "PCM12SMTR" "SMD SWITCH SPDT (PCM12SMTR)" -30.4,-12.5 r90 top (schematic designator S3)
S3C "PCM12SMTR" "SMD SWITCH SPDT (PCM12SMTR)" -16.4,-12.5 r90 top (schematic designator S3)
S3D "PCM12SMTR" "SMD SWITCH SPDT (PCM12SMTR)" -2.4,-12.5 r90 top (schematic designator S3)
S3E "PCM12SMTR" "SMD SWITCH SPDT (PCM12SMTR)" 11.6,-12.5 r90 top (schematic designator S3)
S3F "PCM12SMTR" "SMD SWITCH SPDT (PCM12SMTR)" 25.6,-12.5 r90 top (schematic designator S3)
S3G "PCM12SMTR" "SMD SWITCH SPDT (PCM12SMTR)" 39.6,-12.5 r90 top (schematic designator S3)
S3H "PCM12SMTR" "SMD SWITCH SPDT (PCM12SMTR)" 53.6,-12.5 r90 top (schematic designator S3)
S4A "PCM12SMTR" "SMD SWITCH SPDT (PCM12SMTR)" -44.4,-34.5 r90 top (schematic designator S4)
S4B "PCM12SMTR" "SMD SWITCH SPDT (PCM12SMTR)" -30.4,-34.5 r90 top (schematic designator S4)
S4C "PCM12SMTR" "SMD SWITCH SPDT (PCM12SMTR)" -16.4,-34.5 r90 top (schematic designator S4)
S4D "PCM12SMTR" "SMD SWITCH SPDT (PCM12SMTR)" -2.4,-34.5 r90 top (schematic designator S4)
S4E "PCM12SMTR" "SMD SWITCH SPDT (PCM12SMTR)" 11.6,-34.5 r90 top (schematic designator S4)
S4F "PCM12SMTR" "SMD SWITCH SPDT (PCM12SMTR)" 25.6,-34.5 r90 top (schematic designator S4)
S4G "PCM12SMTR" "SMD SWITCH SPDT (PCM12SMTR)" 39.6,-34.5 r90 top (schematic designator S4)
S4H "PCM12SMTR" "SMD SWITCH SPDT (PCM12SMTR)" 53.6,-34.5 r90 top (schematic designator S4)
U1A "MP34DT05TR-A" "SMD Microphone (MP34DT05TR-A)" -49,33.5 r0 top (schematic designator U1)
U1B "MP34DT05TR-A" "SMD Microphone (MP34DT05TR-A)" -35,33.5 r0 top (schematic designator U1)
U1C "MP34DT05TR-A" "SMD Microphone (MP34DT05TR-A)" -21,33.5 r0 top (schematic designator U1)
U1D "MP34DT05TR-A" "SMD Microphone (MP34DT05TR-A)" -7,33.5 r0 top (schematic designator U1)
U1E "MP34DT05TR-A" "SMD Microphone (MP34DT05TR-A)" 7,33.5 r0 top (schematic designator U1)
U1F "MP34DT05TR-A" "SMD Microphone (MP34DT05TR-A)" 21,33.5 r0 top (schematic designator U1)
U1G "MP34DT05TR-A" "SMD Microphone (MP34DT05TR-A)" 35,33.5 r0 top (schematic designator U1)
U1H "MP34DT05TR-A" "SMD Microphone (MP34DT05TR-A)" 49,33.5 r0 top (schematic designator U1)
U2A "GMA3526H10-B26" "SMD MICROPHONE (GMA3526H10-B26)" -49,12.25 r180 top (schematic designator U2)
U2B "GMA3526H10-B26" "SMD MICROPHONE (GMA3526H10-B26)" -35,12.25 r180 top (schematic designator U2)
U2C "GMA3526H10-B26" "SMD MICROPHONE (GMA3526H10-B26)" -21,12.25 r180 top (schematic designator U2)
U2D "GMA3526H10-B26" "SMD MICROPHONE (GMA3526H10-B26)" -7,12.25 r180 top (schematic designator U2)
U2E "GMA3526H10-B26" "SMD MICROPHONE (GMA3526H10-B26)" 7,12.25 r180 top (schematic designator U2)
U2F "GMA3526H10-B26" "SMD MICROPHONE (GMA3526H10-B26)" 21,12.25 r180 top (schematic designator U2)
U2G "GMA3526H10-B26" "SMD MICROPHONE (GMA3526H10-B26)" 35,12.25 r180 top (schematic designator U2)
U2H "GMA3526H10-B26" "SMD MICROPHONE (GMA3526H10-B26)" 49,12.25 r180 top (schematic designator U2)
U3A "GMA4030H11-F26" "SMD Microphone (GMA4030H11-F26)" -49,-10.5 r0 top (schematic designator U3)
U3B "GMA4030H11-F26" "SMD Microphone (GMA4030H11-F26)" -35,-10.5 r0 top (schematic designator U3)
U3C "GMA4030H11-F26" "SMD Microphone (GMA4030H11-F26)" -21,-10.5 r0 top (schematic designator U3)
U3D "GMA4030H11-F26" "SMD Microphone (GMA4030H11-F26)" -7,-10.5 r0 top (schematic designator U3)
U3E "GMA4030H11-F26" "SMD Microphone (GMA4030H11-F26)" 7,-10.5 r0 top (schematic designator U3)
U3F "GMA4030H11-F26" "SMD Microphone (GMA4030H11-F26)" 21,-10.5 r0 top (schematic designator U3)
U3G "GMA4030H11-F26" "SMD Microphone (GMA4030H11-F26)" 35,-10.5 r0 top (schematic designator U3)
U3H "GMA4030H11-F26" "SMD Microphone (GMA4030H11-F26)" 49,-10.5 r0 top (schematic designator U3)
U4A "SD18OB261-060" "SMD MICROPHONE (SD18OB261-060)" -49,-31.75 r180 top (schematic designator U4)
U4B "SD18OB261-060" "SMD MICROPHONE (SD18OB261-060)" -35,-31.75 r180 top (schematic designator U4)
U4C "SD18OB261-060" "SMD MICROPHONE (SD18OB261-060)" -21,-31.75 r180 top (schematic designator U4)
U4D "SD18OB261-060" "SMD MICROPHONE (SD18OB261-060)" -7,-31.75 r180 top (schematic designator U4)
U4E "SD18OB261-060" "SMD MICROPHONE (SD18OB261-060)" 7,-31.75 r180 top (schematic designator U4)
U4F "SD18OB261-060" "SMD MICROPHONE (SD18OB261-060)" 21,-31.75 r180 top (schematic designator U4)
U4G "SD18OB261-060" "SMD MICROPHONE (SD18OB261-060)" 35,-31.75 r180 top (schematic designator U4)
U4H "SD18OB261-060" "SMD MICROPHONE (SD18OB261-060)" 49,-31.75 r180 top (schematic designator U4)
X1A "1.0-4PWB" "SMD Connector (SM04B-SRSS-TB)" -49,22.6 r0 top (schematic designator X1)
X1B "1.0-4PWB" "SMD Connector (SM04B-SRSS-TB)" -35,22.6 r0 top (schematic designator X1)
X1C "1.0-4PWB" "SMD Connector (SM04B-SRSS-TB)" -21,22.6 r0 top (schematic designator X1)
X1D "1.0-4PWB" "SMD Connector (SM04B-SRSS-TB)" -7,22.6 r0 top (schematic designator X1)
X1E "1.0-4PWB" "SMD Connector (SM04B-SRSS-TB)" 7,22.6 r0 top (schematic designator X1)
X1F "1.0-4PWB" "SMD Connector (SM04B-SRSS-TB)" 21,22.6 r0 top (schematic designator X1)
X1G "1.0-4PWB" "SMD Connector (SM04B-SRSS-TB)" 35,22.6 r0 top (schematic designator X1)
X1H "1.0-4PWB" "SMD Connector (SM04B-SRSS-TB)" 49,22.6 r0 top (schematic designator X1)
X2A "1.0-4PWB" "SMD Connector (SM04B-SRSS-TB)" -49,0.6 r0 top (schematic designator X2)
X2B "1.0-4PWB" "SMD Connector (SM04B-SRSS-TB)" -35,0.6 r0 top (schematic designator X2)
X2C "1.0-4PWB" "SMD Connector (SM04B-SRSS-TB)" -21,0.6 r0 top (schematic designator X2)
X2D "1.0-4PWB" "SMD Connector (SM04B-SRSS-TB)" -7,0.6 r0 top (schematic designator X2)
X2E "1.0-4PWB" "SMD Connector (SM04B-SRSS-TB)" 7,0.6 r0 top (schematic designator X2)
X2F "1.0-4PWB" "SMD Connector (SM04B-SRSS-TB)" 21,0.6 r0 top (schematic designator X2)
X2G "1.0-4PWB" "SMD Connector (SM04B-SRSS-TB)" 35,0.6 r0 top (schematic designator X2)
X2H "1.0-4PWB" "SMD Connector (SM04B-SRSS-TB)" 49,0.6 r0 top (schematic designator X2)
X3A "1.0-4PWB" "SMD Connector (SM04B-SRSS-TB)" -49,-21.4 r0 top (schematic designator X3)
X3B "1.0-4PWB" "SMD Connector (SM04B-SRSS-TB)" -35,-21.4 r0 top (schematic designator X3)
X3C "1.0-4PWB" "SMD Connector (SM04B-SRSS-TB)" -21,-21.4 r0 top (schematic designator X3)
X3D "1.0-4PWB" "SMD Connector (SM04B-SRSS-TB)" -7,-21.4 r0 top (schematic designator X3)
X3E "1.0-4PWB" "SMD Connector (SM04B-SRSS-TB)" 7,-21.4 r0 top (schematic designator X3)
X3F "1.0-4PWB" "SMD Connector (SM04B-SRSS-TB)" 21,-21.4 r0 top (schematic designator X3)
X3G "1.0-4PWB" "SMD Connector (SM04B-SRSS-TB)" 35,-21.4 r0 top (schematic designator X3)
X3H "1.0-4PWB" "SMD Connector (SM04B-SRSS-TB)" 49,-21.4 r0 top (schematic designator X3)
X4A "1.0-4PWB" "SMD Connector (SM04B-SRSS-TB)" -49,-43.4 r0 top (schematic designator X4)
X4B "1.0-4PWB" "SMD Connector (SM04B-SRSS-TB)" -35,-43.4 r0 top (schematic designator X4)
X4C "1.0-4PWB" "SMD Connector (SM04B-SRSS-TB)" -21,-43.4 r0 top (schematic designator X4)
X4D "1.0-4PWB" "SMD Connector (SM04B-SRSS-TB)" -7,-43.4 r0 top (schematic designator X4)
X4E "1.0-4PWB" "SMD Connector (SM04B-SRSS-TB)" 7,-43.4 r0 top (schematic designator X4)
X4F "1.0-4PWB" "SMD Connector (SM04B-SRSS-TB)" 21,-43.4 r0 top (schematic designator X4)
X4G "1.0-4PWB" "SMD Connector (SM04B-SRSS-TB)" 35,-43.4 r0 top (schematic designator X4)
X4H "1.0-4PWB" "SMD Connector (SM04B-SRSS-TB)" 49,-43.4 r0 top (schematic designator X4)

## Footprints (in the part's own frame and the unit in brackets; to place one, negate y for a bottom-side part, rotate by r counter-clockwise, add the part's x,y. Pads: shape width x height; smd on the part's side, far side on the other; paste and mask are expansions set on the pad)
"SMD Connector (SM04B-SRSS-TB)" [mm] "SMD_LED_RED"
  rect 0.7x1.8 smd: 1(-1.5,4.9) 2(-0.5,4.9) 3(0.5,4.9) 4(1.5,4.9)
  rect 1.2x2 smd: NC(-2.8,0.8) NC(2.8,0.8)
  silkscreen extent -3,0 3,6.5, body extent -3,0 3,4.95, height 2.96
"SMD Keramikkondensator 0603" [mil]
  rect 25x35 smd: 1(-30,0) 2(30,0)
  silkscreen extent -30,-15 30,15, body extent -31,-16 32,16, height 32
"SMD Keramikkondensator 1206" [mil]
  rect 45x70 smd: 1(-60,0) 2(60,0)
  silkscreen extent -60,-30 60,30, body extent -63,-31 63,32, height 39
"SMD LED 0606" [mm] "SMD_LED_RED"
  rect 0.75x0.7 smd: 1(-0.7,0.43) 2(0.7,0.43) 3(-0.7,-0.43) 4(0.7,-0.43)
  silkscreen extent -0.9,-0.85 0.8,0.95, body extent -0.8,-0.85 0.8,0.85, height 0.7
"SMD MICROPHONE (GMA3526H10-B26)" [mm]
  rect 0.725x0.522 smd: 1(-0.837,2.074) 2(-0.837,1.252) 4(0.837,1.252) 5(0.837,2.074)
  oval 0.3x0.1 smd: 3(-0.663,0) 3(0.663,0)
  oval 0.1x0.3 smd: 3(0,0.663) 3(0,-0.663)
  round 0.5 hole 0.5 unplated mask+0.665: ""(0,0)
  Top Layer circle w0.3: c0,0 r0.663
  silkscreen extent -1.33,-1.05 1.33,2.47, body extent -1.32,-1.04 1.33,2.46, height 1.08
"SMD Microphone (GMA4030H11-F26)" [mm]
  rect 0.4x0.95 smd: 1(0.425,-0.675) 2(0.425,0.675) 3(-0.425,0.675) 4(-0.425,-0.675)
  rect 0.35x2.3 smd: 5(-1.225,0) 5(1.225,0)
  rect 1.3x0.35 smd: 5(0,-1.725) 5(0,1.725)
  silkscreen extent -1.5,-2.26 1.76,2, body extent -1.5,-2 1.5,2, height 1.08
"SMD Microphone (MP34DT05TR-A)" [mm]
  rect 0.4x0.95 smd: 1(0.425,-0.675) 2(0.425,0.675) 3(-0.425,0.675) 4(-0.425,-0.675)
  rect 0.35x2.3 smd: 5(-1.225,0) 5(1.225,0)
  rect 1.3x0.35 smd: 5(0,-1.725) 5(0,1.725)
  silkscreen extent -1.5,-2.26 1.76,2, body extent -1.5,-2 1.5,2, height 1.02
"SMD MICROPHONE (SD18OB261-060)" [mm]
  rect 0.725x0.522 smd: 1(-0.837,2.074) 2(-0.837,1.252) 4(0.837,1.252) 5(0.837,2.074)
  oval 0.3x0.1 smd: 3(-0.663,0) 3(0.663,0)
  oval 0.1x0.3 smd: 3(0,0.663) 3(0,-0.663)
  round 0.5 hole 0.5 unplated mask+0.665: ""(0,0)
  Top Layer circle w0.3: c0,0 r0.663
  silkscreen extent -1.33,-1.05 1.33,2.47, body extent -1.32,-1.04 1.33,2.46, height 1.08
"SMD Solder-Nut (M3 3mm)" [mm]
  round 0 hole 4.22: 1(0,0)
  Top Layer circle w1.02: c0,0 r2.61
  body extent -2.61,-2.61 2.61,2.61, height 3
"SMD SWITCH SPDT (PCM12SMTR)" [mm]
  rect 0.7x1.5 smd: 1(-2.25,1.75) 2(0.75,1.75) 3(2.25,1.75)
  rect 1x0.8 smd: NC(-3.65,-0.965) NC(-3.65,0.965) NC(3.65,-0.965) NC(3.65,0.965)
  round 0 hole 0.9 unplated: NC(-1.5,0) NC(1.5,0)
  silkscreen extent -3.2,-2.23 3.2,1.3, body extent -3.68,-2.34 3.67,2.23, height 1.4
"SMD Widerstand 0603" [mil]
  rect 25x35 smd: 1(-30,0) 2(30,0)
  silkscreen extent -30,-15 30,15, body extent -31,-16 31,16, height 18